# Altium PCB Title.PcbDoc
Units mm, origin at the board's own origin, x right, y up, seen from the top; angles counter-clockwise.
Board outline 135 x 95 mm, 4 copper layers (L1 Top Layer, L2 GND Inner 1, L3 GND Inner 2, L4 Bottom Layer), stack 1.574 mm thick; 9 components, 1 nets, 1 pads, 0 vias.
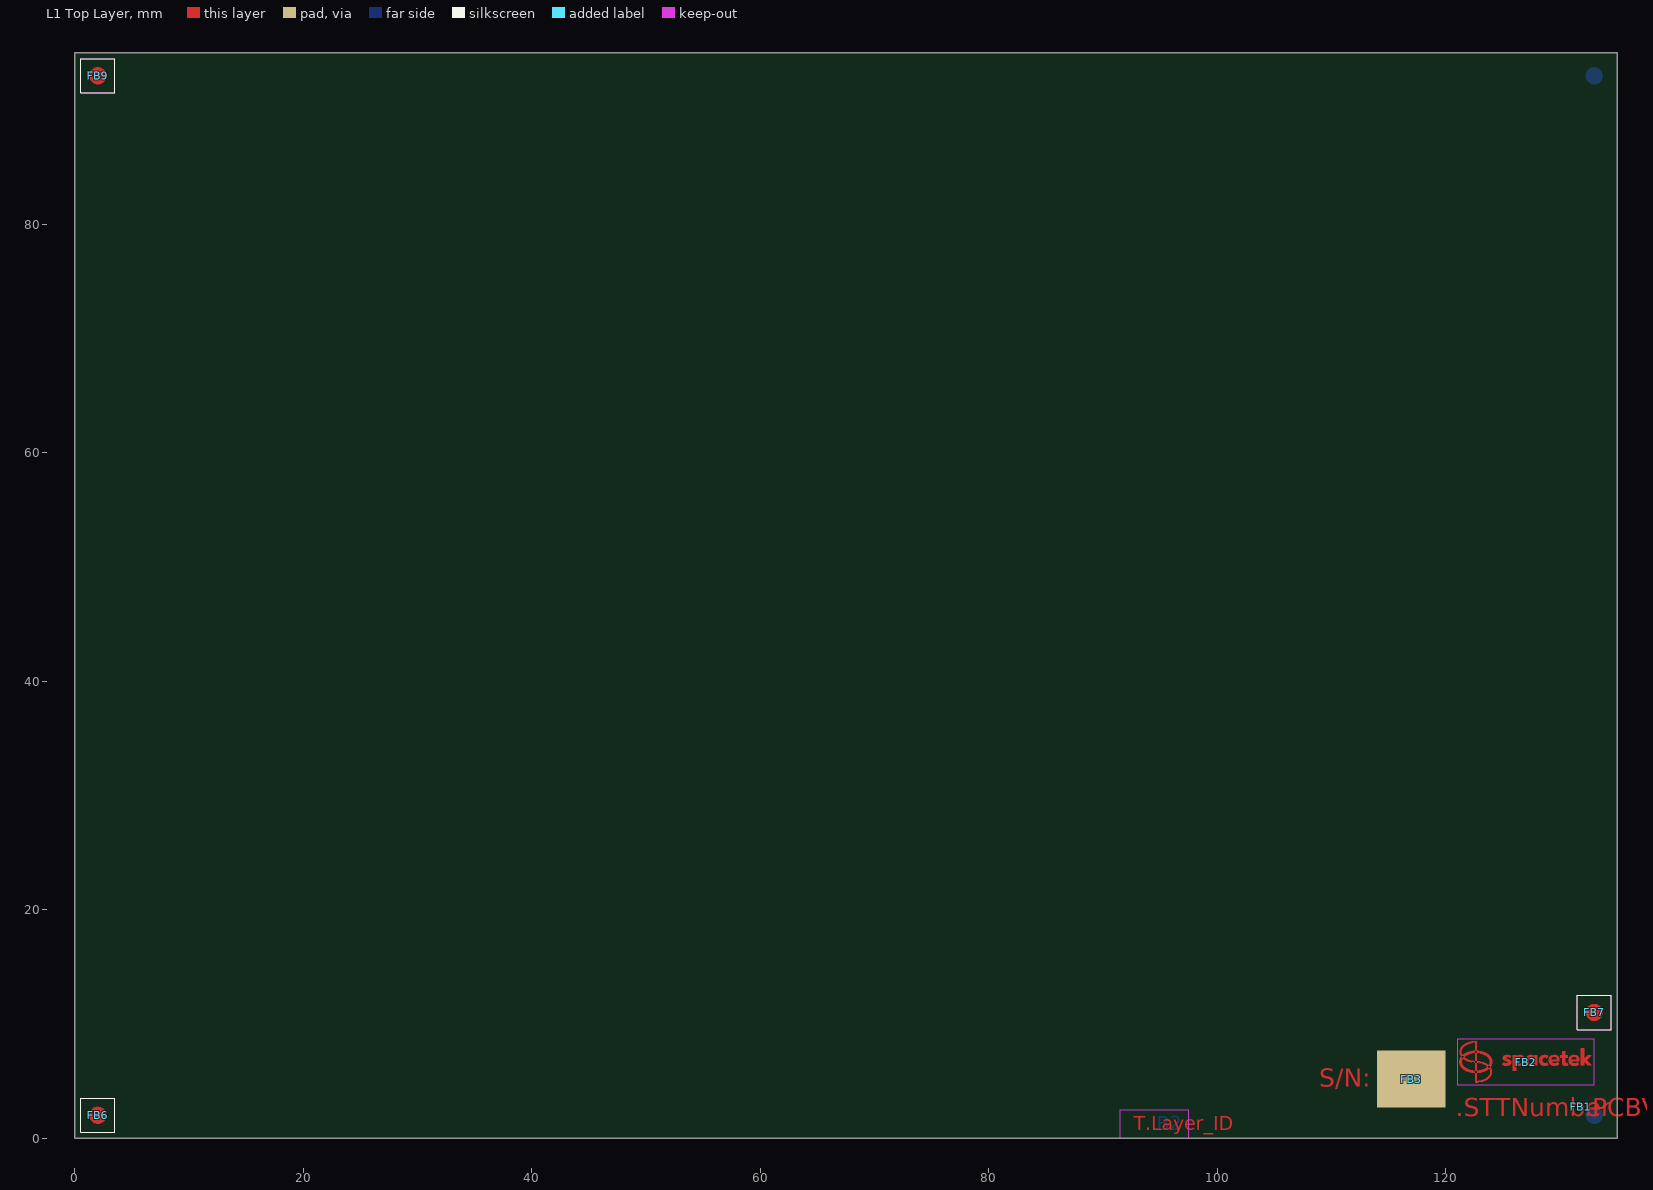
[diagram p0: L1 Top Layer view]
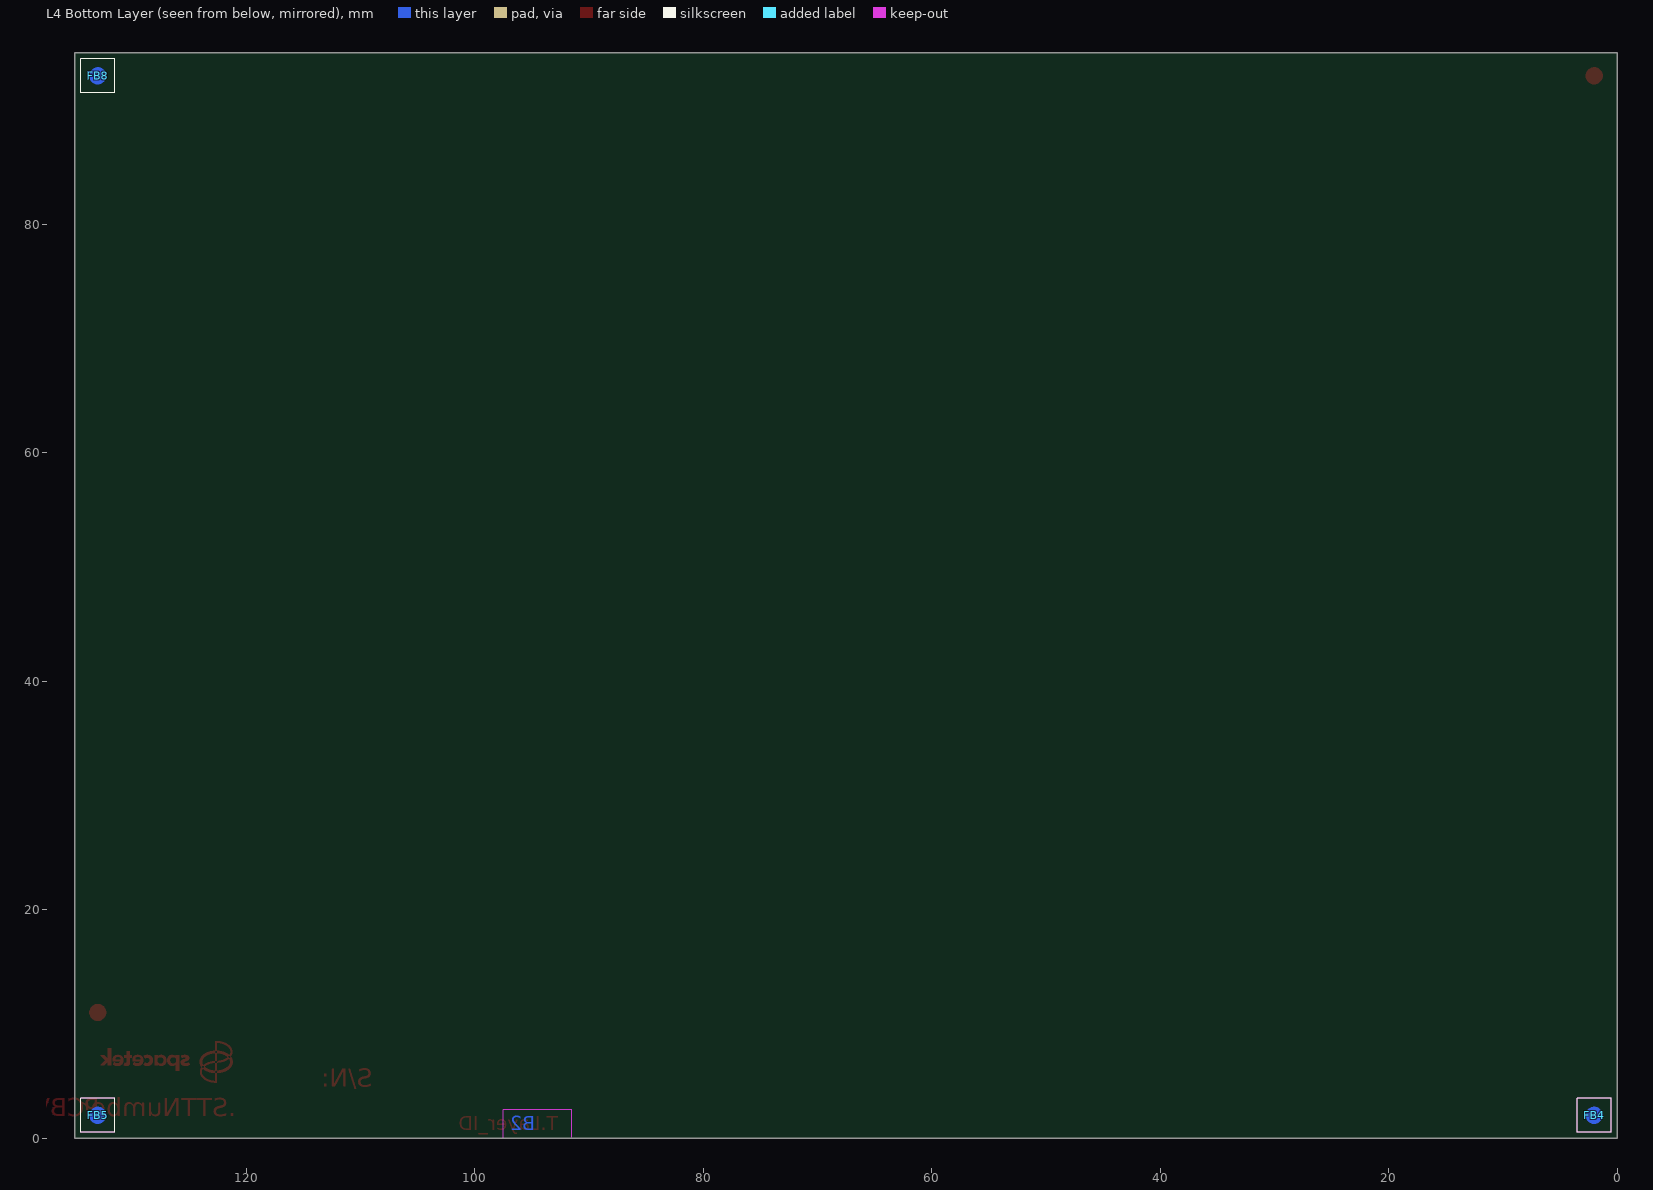
[diagram p1: L4 Bottom Layer view, seen from below]
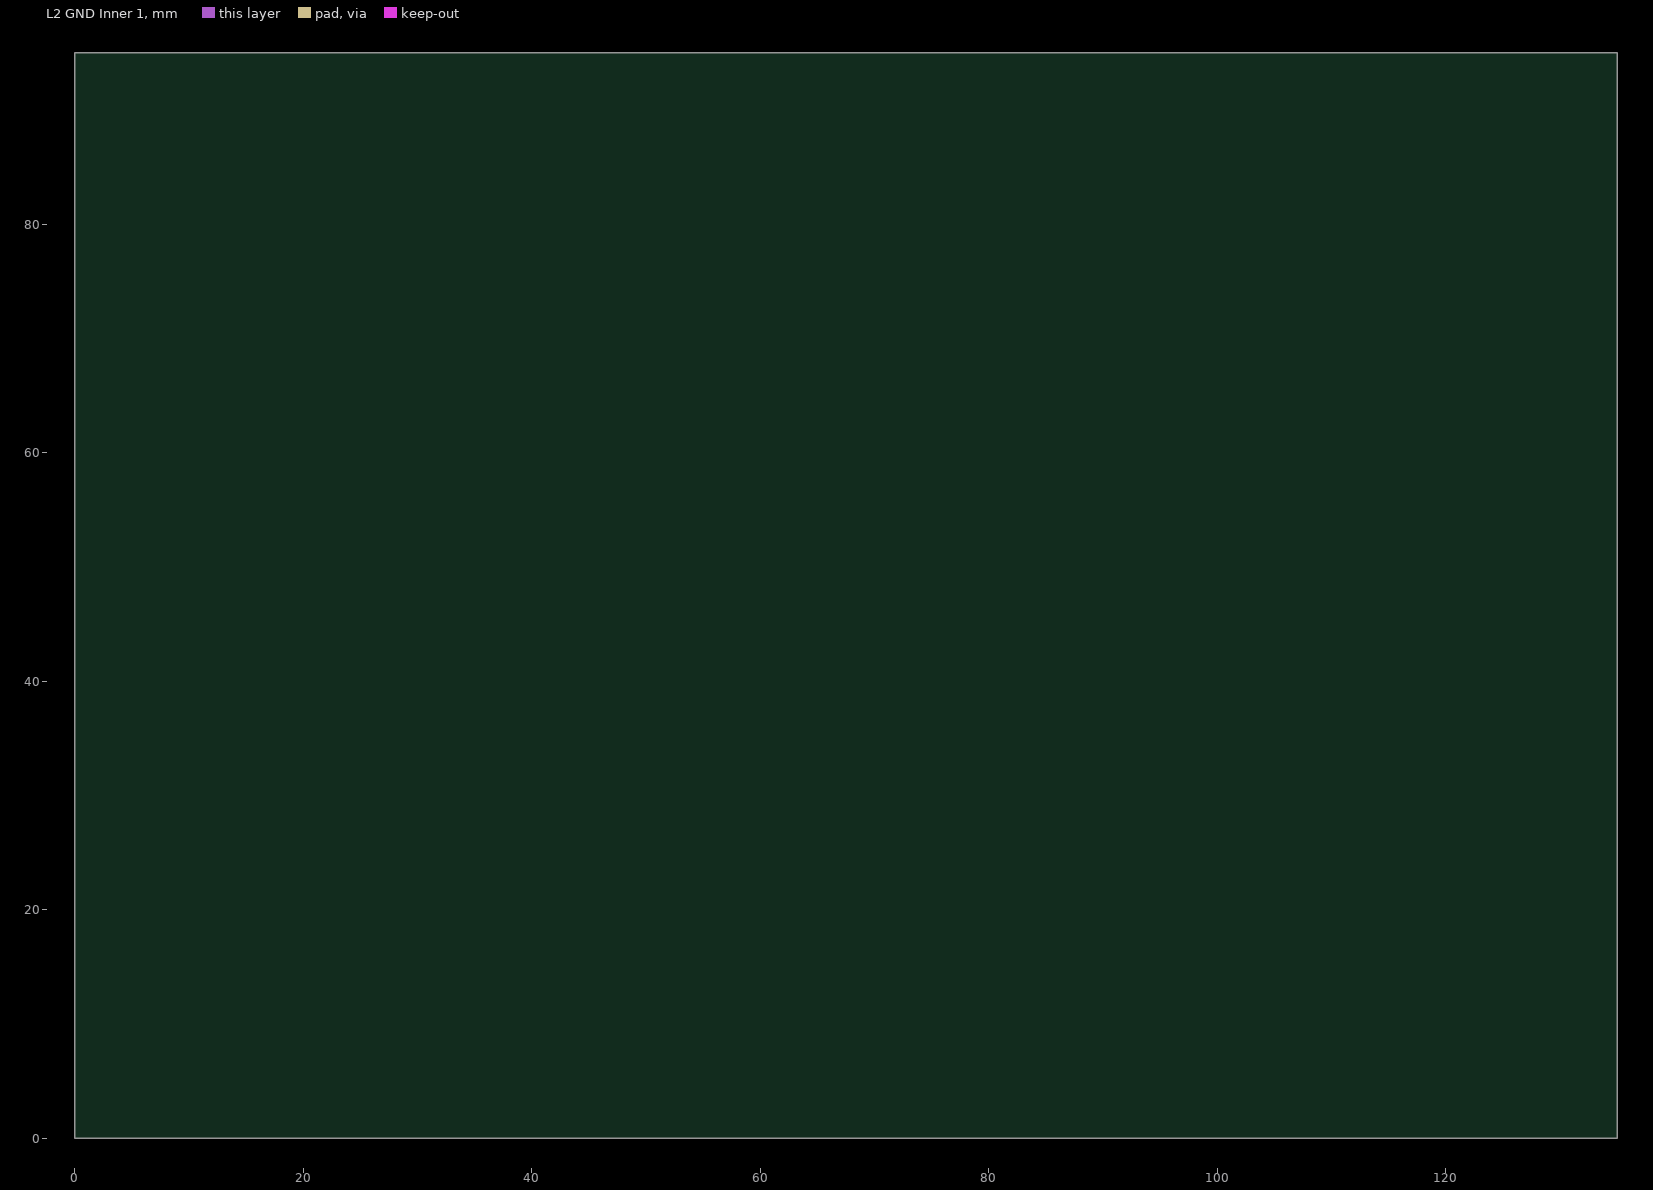
[diagram p2: L2 GND Inner 1]
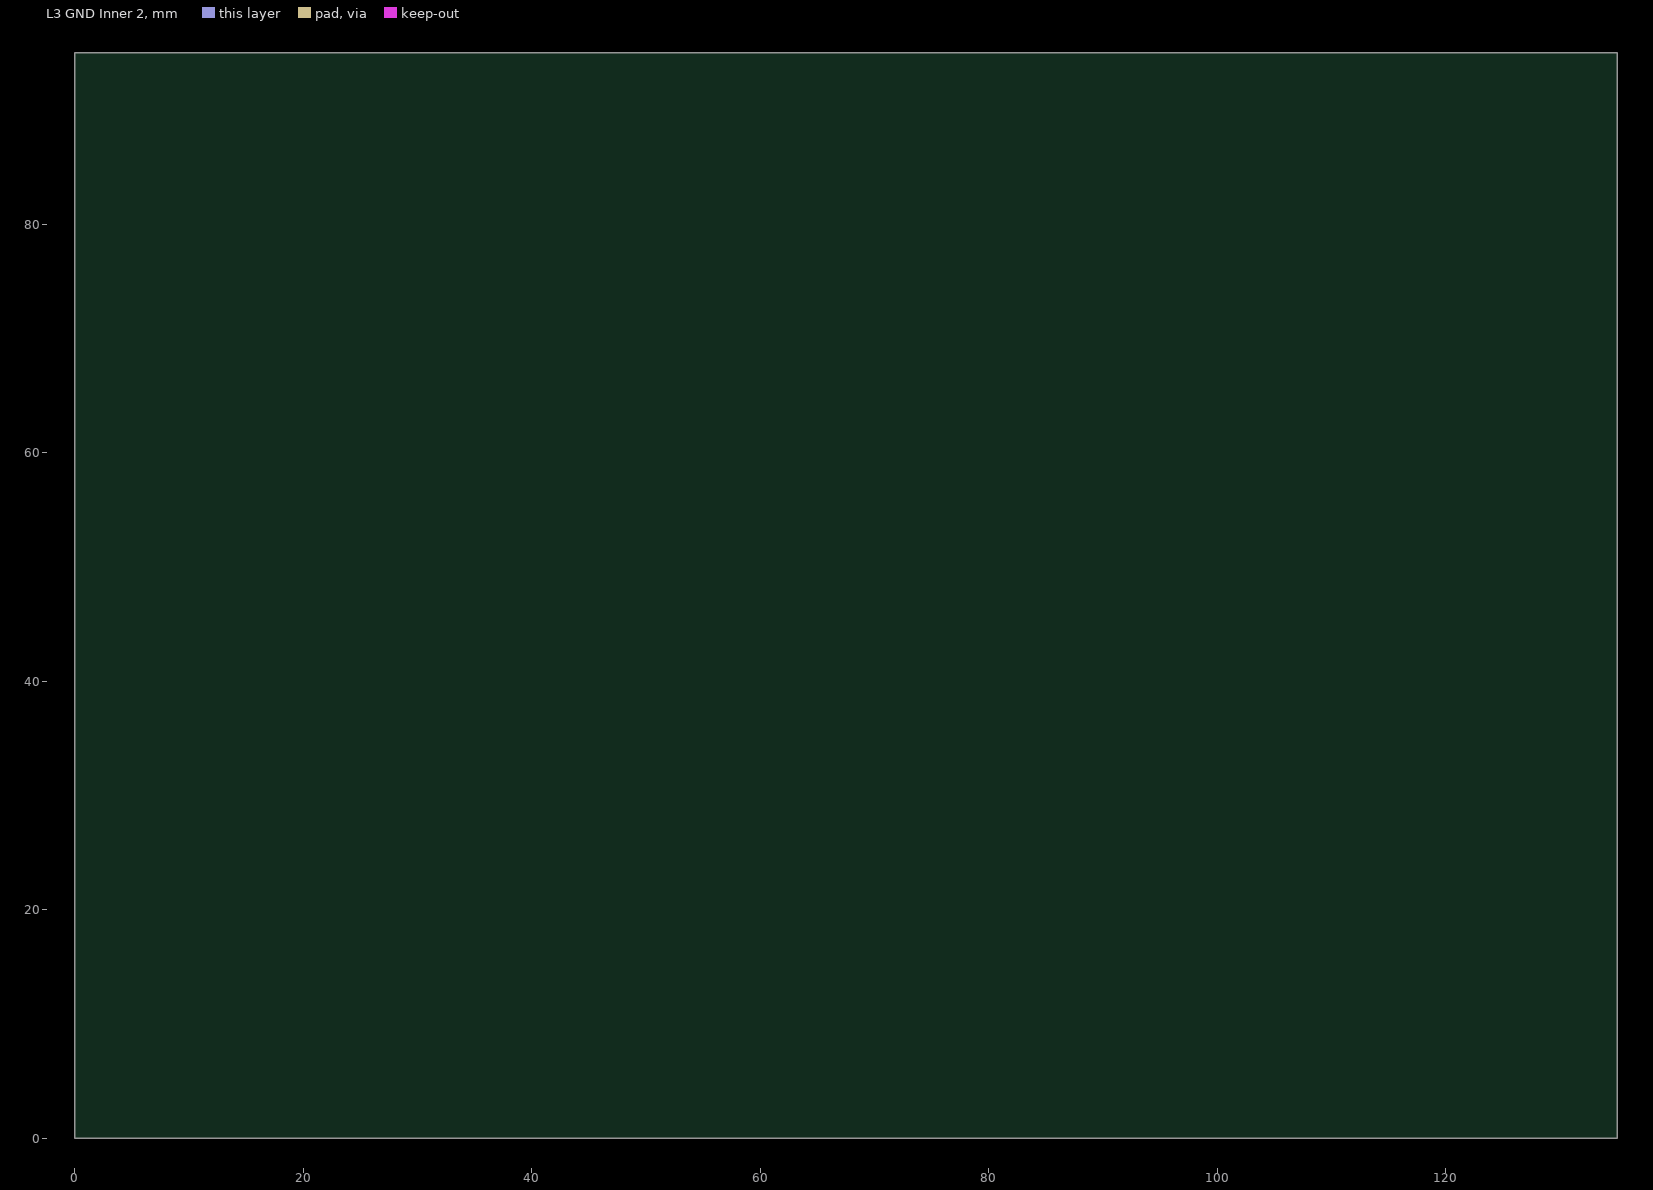
[diagram p3: L3 GND Inner 2]

## Layer stack, top to bottom
Top Solder 1: solder mask 0.0102, Solder Resist, Dk 3.5
L1 Top Layer: signal copper 0.036
Dielectric1: core 0.36, FR, Dk 4.7
L2 GND Inner 1: signal copper 0.036
Dielectric 4: prepreg 0.71, FR4, Dk 4.7
L3 GND Inner 2: signal copper 0.036
Dielectric 2: core 0.36, FR4, Dk 4.7
L4 Bottom Layer: signal copper 0.036
Bottom Solder 1: solder mask 0.0102, Solder Resist, Dk 3.5

## Board outline
0,0 0,95 135,95 135,0

## Design rules (kind name [scope] priority, off if disabled: settings)
BoardOutlineClearance BoardOutlineClearance-User [All] p1: gap=0.5 ignorepadtopadclearanceinfootprint=FALSE except(0: Arc-SplitBarrior Arc-SplitContinuation Track-SplitBarrior Track-SplitContinuation SMDPad-SplitBarrior SMDPad-SplitContinuation THPad-SplitBarrior THPad-SplitContinuation Via-SplitBarrior Via-SplitContinuation Fill-SplitBarrior Fill-SplitContinuation Poly-SplitBarrior Poly-SplitContinuation Region-SplitBarrior Region-SplitContinuation Text-SplitBarrior Text-SplitContinuation)
Clearance Clearance_main [All] p1: gap=0.4 ignorepadtopadclearanceinfootprint=FALSE except(0: Arc-Hole Track-Hole SMDPad-Hole THPad-Hole Via-Hole Fill-Hole Poly-Hole Region-Hole Text-Hole)
Clearance SN [HasFootprint('STT--DO--SN')] p2: gap=0.1 ignorepadtopadclearanceinfootprint=FALSE
Clearance ClearanceDiffPairs [(InDifferentialPairClass('All Differential Pairs'))] p3: gap=0.3 ignorepadtopadclearanceinfootprint=FALSE except(0: Arc-Hole Track-Hole SMDPad-Hole THPad-Hole Via-Hole Fill-Hole Poly-Hole Region-Hole Text-Hole; 0.2: Arc-Track Track-Track Track-THPad Track-Via)
ComponentClearance [All] p1: gap=0.254 collisioncheckmode=3 verticalgap=0 showdistances=FALSE
DiffPairsRouting [All] p1: maxlimit=0.6 minlimit=0.2 mostfreqgap=0.2 toplayer_minwidth=0.2 toplayer_maxwidth=1 toplayer_prefwidth=0.2 midlayer1_minwidth=0.2 midlayer1_maxwidth=1 midlayer1_prefwidth=0.2 midlayer4_minwidth=0.2 midlayer4_maxwidth=1 midlayer4_prefwidth=0.2 bottomlayer_minwidth=0.2 bottomlayer_maxwidth=1 bottomlayer_prefwidth=0.2 maxuncoupledlength=12.7
HoleSize [All] p1: absolutevalues=TRUE maxlimit=6 minlimit=0.3 maxpercent=80.000 minpercent=20.000
HoleToHoleClearance [All] p1: gap=0.3 allowstackedmicrovias=TRUE
MinimumSolderMaskSliver [All] p1: minsoldermaskwidth=0
NetAntennae [All] p1: netantennaetolerance=10
PermittedLayers "Schematic Permitted Layers Rule_1" [InNet('GND')] p1: toplayerpermitted=TRUE bottomlayerpermitted=FALSE
PlaneClearance [All] p1: clearance=0.5
PlaneConnect PlaneConnect_Vias [IsVia] p1: planeconnectstyle=Direct reliefexpansion=0.508 reliefentries=4 reliefconductorwidth=0.254 reliefairgap=0.254
PlaneConnect [All] p2: planeconnectstyle=Relief reliefexpansion=0.5 reliefentries=4 reliefconductorwidth=0.3 reliefairgap=0.3
PolygonConnect PolygonConnect_Vias [IsVia] p1: connectstyle=Direct reliefconductorwidth=0.4 reliefentries=4 polygonreliefangle="90 Angle" airgapwidth=0.3
PolygonConnect [Not IsVia] p2: connectstyle=Direct reliefconductorwidth=0.5 reliefentries=4 polygonreliefangle="90 Angle" airgapwidth=0.3
RoutingVias [All] p1: holewidth=0.3 width=0.7 viastyle="Through Hole" minholewidth=0.3 minwidth=0.7 maxholewidth=2 maxwidth=3
SilkToSilkClearance [All] p1: silktosilkclearance=0
SilkToSolderMaskClearance SilkscreenOverComponentPads [IsPad] p1: minsilkscreentomaskgap=0 clearancetoexposedcopper=TRUE
SolderMaskExpansion SolderMaskExpansionVia [IsVia] p1: expansion=0 istentingtop=TRUE
SolderMaskExpansion [All] p2: expansion=0.1 istentingtop=FALSE
SupplyNets "Schematic Supply Nets" [InNet('GND')] p1: voltage=0.000
UnConnectedPin [All] p1:
Width LOGO [HasFootprint('STT--DO--Logo')] p1: maxlimit=4 minlimit=0.1 preferedwidth=0.3 minimp=50.000000 maximp=50.000000 favimp=50.000000
Width [All] p2: maxlimit=4 minlimit=0.2 preferedwidth=0.3 minimp=50.000000 maximp=50.000000 favimp=50.000000
20 further rules are at their usual default settings.

## Components (designator, comment, footprint, x,y, rotation, side; value= is the part's Value field where it differs from the comment)
FB1 "STTNumber" STT--DO--STT-Number 131.831,2.731 r0 top
FB2 "Logo STT NG Tiny" STT--DO--Logo-New 127,6.663 r0 top
FB3 "SN:" STT--DO--SN 117,5.163 r0 top
FB4 "Fiducial Hadimec" STT--DO--Fiducial-Hadimec 2,2 r180 bottom
FB5 "Fiducial Hadimec" STT--DO--Fiducial-Hadimec 133,2 r180 bottom
FB6 "Fiducial Hadimec" STT--DO--Fiducial-Hadimec 2,2 r0 top
FB7 "Fiducial Hadimec" STT--DO--Fiducial-Hadimec 133,11 r0 top
FB8 "Fiducial Hadimec" STT--DO--Fiducial-Hadimec 133,93 r180 bottom
FB9 "Fiducial Hadimec" STT--DO--Fiducial-Hadimec 2,93 r0 top

## Footprints (in the part's own frame and the unit in brackets; to place one, negate y for a bottom-side part, rotate by r counter-clockwise, add the part's x,y. Pads: shape width x height; smd on the part's side, far side on the other; paste and mask are expansions set on the pad)
STT--DO--Fiducial-Hadimec [mm]
  L1 Top Layer circle w0.75: c0,0 r0.375
  L1 Top Layer keep-out lines w0.1: 1.5,-1.5 -1.5,-1.5 -1.5,1.5 1.5,1.5 1.5,-1.5
  silkscreen extent -1.5,-1.5 1.5,1.5
STT--DO--Logo-New [mm]
  L1 Top Layer region: 2361 vertices and 0 holes, not listed, extent 1.18,-0.324 1.978,0.615
  L1 Top Layer region: -4.427,0.465 -4.427,0.773 -4.428,0.773 -4.428,0.776 -4.427,0.776 -4.427,0.778 -4.424,0.778 -4.424,0.776 -4.423,0.776 -4.423,0.775 -4.421,0.775 -4.421,0.774 -4.418,0.774 -4.418,0.773 -4.416,0.773 -4.416,0.772 -4.413,0.772 -4.413,0.771 -4.411,0.771 -4.411,0.769 -4.408,0.769 -4.408,0.768 -4.405,0.768 -4.405,0.767 -4.402,0.767 -4.402,0.766 -4.398,0.766 -4.398,0.765 -4.395,0.765 -4.395,0.764 -4.389,0.764 -4.389,0.762 -4.385,0.762 -4.385,0.761 -4.377,0.761 -4.377,0.76 -4.347,0.76 -4.347,0.761 -4.341,0.761 -4.341,0.762 -4.336,0.762 -4.336,0.764 -4.329,0.764 -4.329,0.765 -4.327,0.765 -4.327,0.766 -4.322,0.766 -4.322,0.767 -4.32,0.767 -4.32,0.768 -4.316,0.768 -4.316,0.769 -4.313,0.769 -4.313,0.771 -4.312,0.771 -4.312,0.772 -4.308,0.772 -4.308,0.773 -4.307,0.773 -4.307,0.774 -4.304,0.774 -4.304,0.775 -4.302,0.775 -4.302,0.776 -4.299,0.776 -4.299,0.121 -4.3,0.121 -4.3,0.12 -4.302,0.12 -4.302,0.121 -4.305,0.121 -4.305,0.122 -4.306,0.122 -4.306,0.123 -4.309,0.123 -4.309,0.124 -4.311,0.124 -4.311,0.126 -4.314,0.126 -4.314,0.127 -4.316,0.127 -4.316,0.128 -4.319,0.128 -4.319,0.129 -4.323,0.129 -4.323,0.13 -4.326,0.13 -4.326,0.131 -4.33,0.131 -4.33,0.133 -4.335,0.133 -4.335,0.134 -4.34,0.134 -4.34,0.135 -4.348,0.135 -4.348,0.136 -4.356,0.136 -4.356,0.137 -4.369,0.137 -4.369,0.136 -4.377,0.136 -4.377,0.135 -4.385,0.135 -4.385,0.134 -4.391,0.134 -4.391,0.133 -4.394,0.133 -4.394,0.131 -4.399,0.131 -4.399,0.13 -4.401,0.13 -4.401,0.129 -4.406,0.129 -4.406,0.128 -4.408,0.128 -4.408,0.127 -4.41,0.127 -4.41,0.126 -4.414,0.126 -4.414,0.124 -4.415,0.124 -4.415,0.123 -4.418,0.123 -4.418,0.122 -4.42,0.122 -4.42,0.121 -4.422,0.121 -4.422,0.12 -4.424,0.12 -4.424,0.119 -4.427,0.119 -4.427,0.464
  L1 Top Layer region: 2867 vertices and 0 holes, not listed, extent -4.285,-0.432 -2.926,0.981
  L1 Top Layer region: 1395 vertices and 0 holes, not listed, extent -4.26,-0.392 -3.236,0.069
  L1 Top Layer region: 1577 vertices and 0 holes, not listed, extent -5.532,0.441 -4.439,0.981
  L1 Top Layer region: 2163 vertices and 1 holes, not listed, extent 3.768,-0.324 4.695,0.615
  L1 Top Layer region: 2143 vertices and 1 holes, not listed, extent 2.025,-0.324 2.952,0.615
  L1 Top Layer region: 1433 vertices and 1 holes, not listed, extent 0.007,-0.324 1.029,0.615
  L1 Top Layer region: 722 vertices and 0 holes, not listed, extent 3.024,-0.324 3.721,0.953
  L1 Top Layer region: -4.299,-0.262 -4.299,-0.754 -4.304,-0.754 -4.304,-0.753 -4.305,-0.753 -4.305,-0.751 -4.307,-0.751 -4.307,-0.75 -4.309,-0.75 -4.309,-0.749 -4.311,-0.749 -4.311,-0.748 -4.315,-0.748 -4.315,-0.747 -4.316,-0.747 -4.316,-0.746 -4.32,-0.746 -4.32,-0.744 -4.323,-0.744 -4.323,-0.743 -4.326,-0.743 -4.326,-0.742 -4.331,-0.742 -4.331,-0.741 -4.335,-0.741 -4.335,-0.74 -4.342,-0.74 -4.342,-0.739 -4.35,-0.739 -4.35,-0.737 -4.376,-0.737 -4.376,-0.739 -4.382,-0.739 -4.382,-0.74 -4.389,-0.74 -4.389,-0.741 -4.393,-0.741 -4.393,-0.742 -4.399,-0.742 -4.399,-0.743 -4.401,-0.743 -4.401,-0.744 -4.405,-0.744 -4.405,-0.746 -4.408,-0.746 -4.408,-0.747 -4.41,-0.747 -4.41,-0.748 -4.414,-0.748 -4.414,-0.749 -4.415,-0.749 -4.415,-0.75 -4.418,-0.75 -4.418,-0.751 -4.42,-0.751 -4.42,-0.753 -4.422,-0.753 -4.422,-0.754 -4.424,-0.754 -4.424,-0.755 -4.427,-0.755 -4.427,-0.75 -4.428,-0.75 -4.428,-0.749 -4.427,-0.749 -4.427,-0.744 -4.428,-0.744 -4.428,-0.742 -4.427,-0.742 -4.427,-0.095 -4.428,-0.095 -4.428,-0.092 -4.427,-0.092 -4.427,-0.091 -4.424,-0.091 -4.424,-0.092 -4.423,-0.092 -4.423,-0.094 -4.421,-0.094 -4.421,-0.095 -4.418,-0.095 -4.418,-0.096 -4.416,-0.096 -4.416,-0.097 -4.414,-0.097 -4.414,-0.098 -4.411,-0.098 -4.411,-0.099 -4.408,-0.099 -4.408,-0.101 -4.406,-0.101 -4.406,-0.102 -4.402,-0.102 -4.402,-0.103 -4.399,-0.103 -4.399,-0.104 -4.396,-0.104 -4.396,-0.105 -4.391,-0.105 -4.391,-0.106 -4.386,-0.106 -4.386,-0.108 -4.377,-0.108 -4.377,-0.109 -4.348,-0.109 -4.348,-0.108 -4.338,-0.108 -4.338,-0.106 -4.335,-0.106 -4.335,-0.105 -4.329,-0.105 -4.329,-0.104 -4.326,-0.104 -4.326,-0.103 -4.322,-0.103 -4.322,-0.102 -4.319,-0.102 -4.319,-0.101 -4.316,-0.101 -4.316,-0.099 -4.313,-0.099 -4.313,-0.098 -4.311,-0.098 -4.311,-0.097 -4.308,-0.097 -4.308,-0.096 -4.306,-0.096 -4.306,-0.095 -4.304,-0.095 -4.304,-0.094 -4.302,-0.094 -4.302,-0.092 -4.299,-0.092 -4.299,-0.261
  L1 Top Layer region: 2875 vertices and 0 holes, not listed, extent -5.8,-0.957 -4.44,0.457
  L1 Top Layer region: 1594 vertices and 0 holes, not listed, extent -4.286,-0.957 -3.191,-0.417
  L1 Top Layer region: 2612 vertices and 0 holes, not listed, extent 4.831,-0.299 5.799,1.189
  L1 Top Layer region: 2698 vertices and 0 holes, not listed, extent -4.428,-1.8 -2.96,-0.467
  L1 Top Layer region: 2592 vertices and 0 holes, not listed, extent -2.037,-0.324 -1.271,0.615
  L1 Top Layer region: 1398 vertices and 0 holes, not listed, extent -5.488,-0.045 -4.468,0.416
  L1 Top Layer region: 2717 vertices and 0 holes, not listed, extent -5.766,0.492 -4.299,1.824
  L1 Top Layer region: 1427 vertices and 1 holes, not listed, extent -1.115,-0.749 -0.092,0.615
  L1 Top Layer keep-out region: -5.979,-2 6,-2 6,2 -5.979,2
STT--DO--SN [mm]
  rect 6x5 smd paste-2539.97: 1(0,0)
  L1 Top Layer pour cut-out: -8.45,1.5 -3.35,1.5 -3.35,-1.5 -8.45,-1.5
STT--DO--STT-Number [mm]

## Part data
FB1: library part 800002-6, "Fabrication Object STTNumber SMD--STTNumber", Package=SMD--STTNumber, PartNumber=STTNumber, preferred=Yes, Status=active, Type="Fabrication Object"
FB2: library part CMP-042-000002-2, "Fabrication Object Logo STT NG SMD--LOGO", Package=SMD--LOGO, A-Number=800071, PartNumber="Logo STT NG Tiny", Status=draft, Type="Fabrication Object"
FB3: library part 800001-6, "Fabrication Object SN: SMD--SN", Package=SMD--SN, A-Number=800001, PartNumber=SN:, preferred=Yes, Status=active, Type="Fabrication Object"
FB4 FB5 FB6 FB7 FB8 FB9: library part 800066-3, "Fabrication Object Fiducial Hadimec SMD--Fiducial-point 1.5 / 3mm", Package=SMD--Fiducial-point, A-Number=800066, PartNumber="Fiducial Hadimec", preferred=Yes, Special="1.5 / 3mm", Status=active, Type="Fabrication Object"

## Nets (pads, with @x,y where several pads share a name; then routed paths per layer and width w, separated by ;. In a path a pad name is that pad's centre, name@x,y a point inside that pad or via, vN(x,y) a via of type N, cw(c..) or ccw(c..) an arc to the next point about the centre after c; other vN are vias at no path point)
GND: FB3.1

## Keep-outs
L1 Top Layer:
  lines w0.1: 91.5,0 91.5,2.5 97.5,2.5 97.5,0
L4 Bottom Layer:
  lines w0.1: 91.5,0 91.5,2.5 97.5,2.5 97.5,0

## Other copper
L1 Top Layer:
  text "T.Layer_ID" at 92.7,0.7 h1.2
  text ".Layer_Name" at 29.689,-16.58 h1.8
L2 GND Inner 1:
  text ".Layer_Name" at 29.7,-16.6 h1.8
L3 GND Inner 2:
  text ".Layer_Name" at 29.7,-16.6 h1.8
L4 Bottom Layer:
  text "B2" at 94.7,0.7 h1.2
  text ".Layer_Name" at 29.689,-16.58 h1.8

## Silkscreen, mask and mechanical layers (free items; w line width, h text height)
Top Solder 1:
  text ".Layer_Name" at 29.689,-16.512 h1.8
Bottom Solder 1:
  text ".Layer_Name" at 29.689,-16.58 h1.8
M01_Board-Outline:
  the board outline again, w0.2
M02_Miscellaneous:
  text ".Layer_Name" at 29.689,-16.58 h1.8
M04_Miscellaneous:
  text ".Layer_Name" at 29.689,-16.58 h1.8
M05_Drill-Infos:
  text ".Layer_Name" at 29.689,-16.58 h1.8
M06_Board-Dimensions:
  text ".Layer_Name" at 29.672,-16.629 h1.8
M07_Case-Top:
  text ".Layer_Name" at 29.689,-16.58 h1.8
M08_Case-Bot:
  text ".Layer_Name" at 29.689,-16.58 h1.8
M09_DXF-Top:
  text ".Layer_Name" at 29.689,-16.58 h1.8
M10_DXF-Bot:
  text ".Layer_Name" at 29.689,-16.58 h1.8
M13_Comp-Outline-Top:
  text ".Layer_Name" at 29.689,-16.58 h1.8
M14_Comp-Outline-Bot:
  text ".Layer_Name" at 29.689,-16.58 h1.8
M15_Place-Outline-Top:
  text ".Layer_Name" at 29.689,-16.58 h1.8
Drill Drawing:
  circle w0.12: c48.997,110.567 r0.667
  lines w0.12: 48.33,112.9 48.664,112.9 48.997,113.233 49.33,112.9 49.664,112.9 49.664,113.233 49.33,113.567 49.664,113.9 49.664,114.233 49.33,114.233 48.997,113.9 48.664,114.233 48.33,114.233 48.33,113.9 48.664,113.567 48.33,113.233 48.33,112.9 ; 48.33,116.233 48.33,116.9 48.664,116.9 48.664,117.233 49.33,117.233 49.33,116.9 49.664,116.9 49.664,116.233 49.33,116.233 49.33,115.9 48.664,115.9 48.664,116.233 48.33,116.233 ; 48.33,118.9 48.33,120.233 49.664,120.233 49.664,118.9 48.33,118.9 ; 48.33,123.233 48.997,121.9 49.664,123.233 48.33,123.233
  lines w0.2: 47.159,109 95.435,109 ; 47.159,124 95.435,124 ; 56.955,106 56.955,127 ; 66.285,106 66.285,127 ; 77.285,106 77.285,127 ; 84.968,106 84.968,127 ; 47.159,106 47.159,127 95.435,127 95.435,106 47.159,106
  text "Symbol" at 48.959,124.9 h1.44
  text "Count" at 57.855,124.9 h1.44
  text "Hole Size" at 67.185,124.9 h1.44
  text "Plated" at 78.185,124.9 h1.44
  text "Via/Pad" at 85.868,124.9 h1.44
  text "140" at 57.855,121.9 h1.2
  text "0.30mm" at 67.185,121.9 h1.2
  text "PTH" at 78.185,121.9 h1.2
  text "Via" at 85.868,121.9 h1.2
  text "10" at 57.855,118.9 h1.2
  text "0.90mm" at 67.185,118.9 h1.2
  text "PTH" at 78.185,118.9 h1.2
  text "Pad" at 85.868,118.9 h1.2
  text "4" at 57.855,115.9 h1.2
  text "1.30mm" at 67.185,115.9 h1.2
  text "PTH" at 78.185,115.9 h1.2
  text "Pad" at 85.868,115.9 h1.2
  text "5" at 57.855,112.9 h1.2
  text "2.70mm" at 67.185,112.9 h1.2
  text "PTH" at 78.185,112.9 h1.2
  text "Pad" at 85.868,112.9 h1.2
  text "2" at 57.855,109.9 h1.2
  text "3.30mm" at 67.185,109.9 h1.2
  text "PTH" at 78.185,109.9 h1.2
  text "Pad" at 85.868,109.9 h1.2
  text "161 Total" at 57.855,106.9 h1.2
  text ".Layer_Name" at 29.689,-16.512 h1.8
  text "View from Top" at 40.015,-19.551 h1.2
M18_Title-Top:
  lines w0.15: -19.601,-22.575 89.899,-22.575 ; -19.601,-22.575 -19.601,-11.575 89.899,-11.575 ; 7.399,-22.575 7.399,-11.575 ; 7.399,-20.575 48.899,-20.575 ; 7.399,-17.575 89.899,-17.575 ; 29.624,-17.575 29.624,-11.575 ; 29.624,-17.301 29.624,-14.301 ; 48.699,-20.575 89.899,-20.575 ; 53.197,-20.575 53.197,-17.575 ; 64.899,-20.575 64.899,-17.575 ; 68.899,-17.575 68.899,-14.575 97.125,-14.575 ; 68.899,-14.575 68.899,-11.575 ; 76.899,-20.575 76.899,-17.575 ; 88.6,-20.576 88.6,-17.576 88.6,-14.576 ; 88.6,-14.575 88.6,-11.575 ; 89.898,-22.576 118.124,-22.576 118.124,-11.575 89.898,-11.575 ; 89.898,-20.575 118.124,-20.575 ; 89.898,-17.576 118.124,-17.576 ; 89.898,-14.575 118.124,-14.575
  text "VERTRAULICH CONFIDENTIAL Copyright by Spacetek Technology AG. Fuer dieses Dokument behalten wir uns alle Rechte vor. We reserve all rights in respect of this document." at -3.275,-11.1 h1
  text "Project:" at 16.1,-13.3 h1
  text "Artwork:" at 46.7,-13.3 h1
  text "Variant:" at 90.024,-13.55 h1
  text "Number:" at 69.899,-13.575 h1
  text ".VariantName" at 97.574,-13.6 h1
  text ".Organization" at -18.9,-13.7 h1.4
  text ".STTNumber" at 77.499,-14.012 h1
  text ".Address1" at -18.9,-16 h1
  text ".VersionControl_RevNumberShort" at 97.324,-16.475 h1
  text ".Project" at 10.9,-16.6 h1.5
  text "Date:" at 70.831,-16.606 h1
  text ".PCBRelease" at 77.499,-16.606 h1
  text "GIT:" at 91.074,-16.6 h1
  text ".Address2" at -18.9,-17.9 h1
  text "Design:" at 66.099,-19.475 h1
  text "Model:" at 7.899,-19.575 h1
  text ".Board" at 12.899,-19.575 h1.2
  text "Version:" at 54.599,-19.675 h1
  text ".PCBVersion" at 60.699,-19.675 h1.1
  text ".PCBDrawnBy" at 71.725,-19.675 h1.1
  text "Check:" at 77.899,-19.675 h1
  text "Print Date:" at 89.024,-19.675 h1
  text ".print_Date" at 97.449,-19.675 h1
  text ".Address3" at -18.9,-19.7 h1
  text ".PCBCheckedBy" at 82.925,-19.775 h1.1
  text ".print_Time" at 106.575,-19.775 h1
  text ".Address4" at -18.901,-21.375 h1
  text ".GitLink" at 8.075,-21.975 h0.9
  text ".Pcb_File_Name_No_Path" at 82.4,-22.3 h0.9
M19_Title-Bot:
  lines w0.15: -19.601,-20.575 8.625,-20.575 ; -19.601,-17.575 8.625,-17.575 ; -19.601,-14.575 8.625,-14.575 ; 1.398,-14.575 29.624,-14.575 ; 8.624,-22.575 118.124,-22.575 118.124,-11.575 8.624,-11.575 ; 8.624,-20.575 49.824,-20.575 ; 8.624,-17.575 91.124,-17.575 ; 8.625,-22.575 -19.601,-22.575 -19.601,-11.575 8.625,-11.575 ; 9.922,-20.575 9.922,-17.575 9.922,-14.575 ; 9.922,-14.575 9.922,-11.575 ; 21.624,-20.575 21.624,-17.574 ; 29.624,-17.575 29.624,-14.575 ; 29.624,-11.575 29.624,-14.575 ; 33.624,-20.575 33.624,-17.575 ; 45.325,-20.575 45.325,-17.574 ; 49.624,-20.575 91.124,-20.575 ; 68.899,-17.575 68.899,-11.575 ; 68.899,-17.3 68.899,-14.3 ; 91.124,-22.575 91.124,-11.575
  text "VERTRAULICH CONFIDENTIAL Copyright by Spacetek Technology AG. Fuer dieses Dokument behalten wir uns alle Rechte vor. We reserve all rights in respect of this document." at 101.8,-11.1 h1
  text "Artwork:" at 51.822,-13.3 h1
  text "Project:" at 82.422,-13.3 h1
  text "Variant:" at 8.499,-13.55 h1
  text "Number:" at 28.624,-13.575 h1
  text ".VariantName" at 0.949,-13.6 h1
  text ".Organization" at 117.422,-13.7 h1.4
  text ".STTNumber" at 21.475,-13.937 h1
  text ".Address1" at 117.422,-16 h1
  text ".VersionControl_RevNumberShort" at 1.199,-16.475 h1
  text "Date:" at 28.624,-16.582 h1
  text "GIT:" at 7.449,-16.6 h1
  text ".PCBRelease" at 21.324,-16.6 h1
  text ".Project" at 87.622,-16.6 h1.5
  text ".Address2" at 117.422,-17.9 h1
  text "Design:" at 32.424,-19.475 h1
  text ".Board" at 85.624,-19.575 h1.2
  text "Model:" at 90.624,-19.575 h1
  text ".print_Time" at -8.751,-19.625 h1
  text ".PCBDrawnBy" at 26.95,-19.625 h1.1
  text ".print_Date" at 1.074,-19.675 h1
  text "Print Date:" at 9.499,-19.675 h1
  text ".PCBCheckedBy" at 15.325,-19.675 h1.1
  text "Check:" at 20.624,-19.675 h1
  text ".PCBVersion" at 37.824,-19.675 h1.1
  text "Version:" at 43.924,-19.675 h1
  text ".Address3" at 117.422,-19.7 h1
  text ".Address4" at 117.424,-21.375 h1
  text ".GitLink" at 90.447,-21.975 h0.9
  text ".Pcb_File_Name_No_Path" at 16.122,-22.3 h0.9

## Dimensions
0,0 to 135,0 on M06_Board-Dimensions
0,0 to 0,95 on M06_Board-Dimensions

## Text inside footprints (layer, text, board x,y; h text height)
FB3: L1 Top Layer "S/N:" at 108.95,4.488 h1.6